# Altium PCB valix_PCB1_Layout1.PcbDoc (part 2 of 3)
Units mil, origin at the board's own origin, x right, y up, seen from the top; angles counter-clockwise.
Board outline 4500 x 2000 mil, 10 copper layers (Top Layer, L2 IntP, L3 Sig, L4 IntP GND, L5 Sig, L6 IntP GND, L7 IntP pwr, L8 Sig, L9 IntP GND, Bottom Layer), stack 81.302 mil thick; 152 components, 166 nets, 818 pads, 544 vias.
Unrouted connection lines stored in the file: 42.
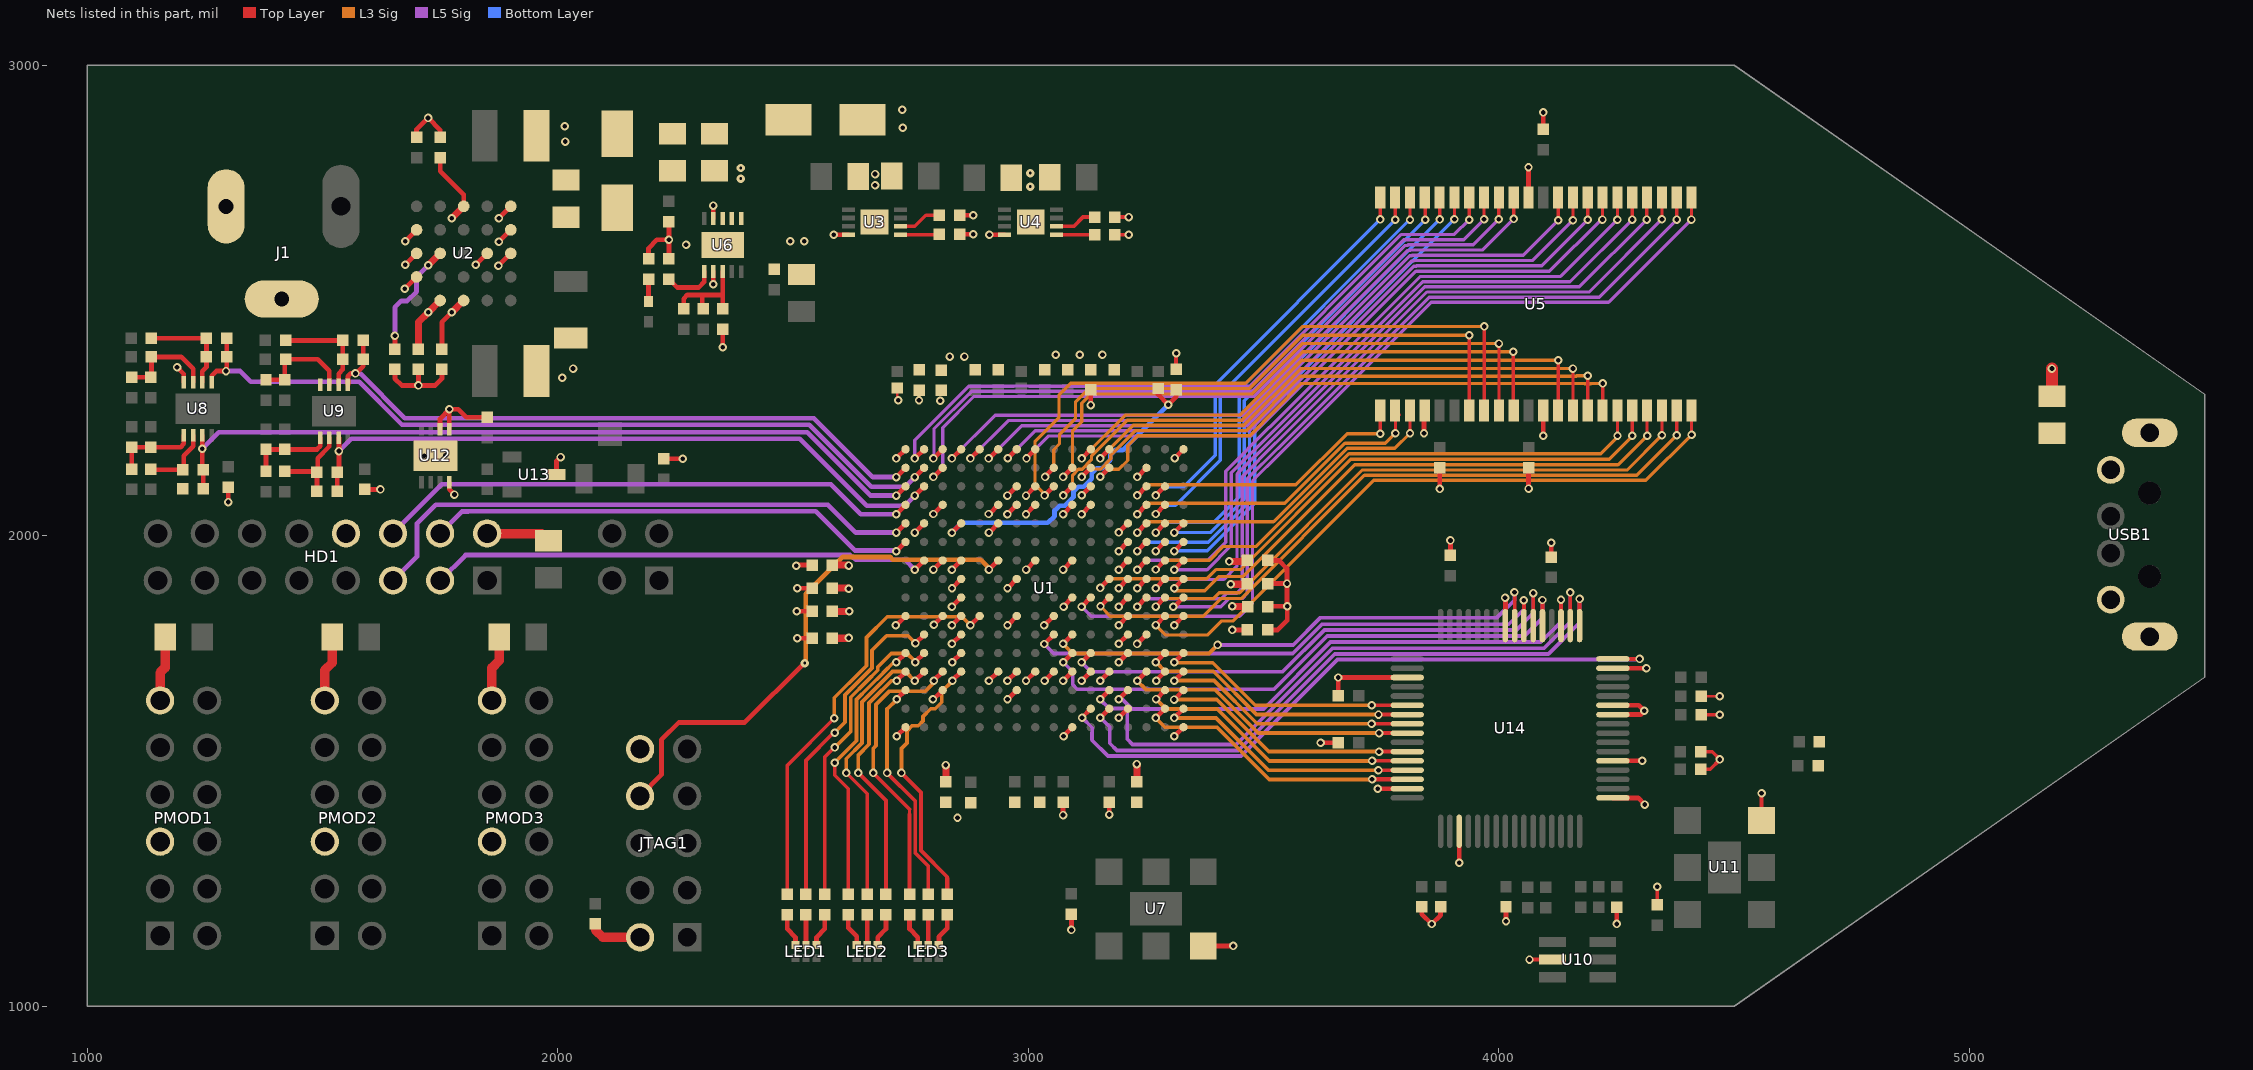
[diagram p10: the nets of this part, all layers, seen from the top]

## Via types
v1: diameter 18, hole 10, Top Layer to Bottom Layer, 261 vias
v2: diameter 18, hole 10, Top Layer to Bottom Layer, tented top, 261 vias
v3: diameter 19.68, hole 7.87, Top Layer to Bottom Layer, 12 vias
v4: diameter 18, hole 6, Top Layer to Bottom Layer, 10 vias

## Nets (pads, with @x,y where several pads share a name; then routed paths per layer and width w, separated by ;. In a path a pad name is that pad's centre, name@x,y a point inside that pad or via, vN(x,y) a via of type N, cw(c..) or ccw(c..) an arc to the next point about the centre after c; other vN are vias at no path point) (continued)
3P3V_FPGA: C52.1 C53.1 C54.1 C55.1 C60.1 C61.1 C62.1 C63.1 C64.1 C66.1 C67.1 C68.1 C69.1 L3.2 U1.C7 U1.D7 U1.D8 U1.D10 U1.D11 U1.F13 U1.G4 U1.G13 U1.H4 U1.H13 U1.J4 U1.J13 U1.K4 U1.K13 U1.L4 U1.L13 U1.M13 U1.N6 U1.N7 U1.N8 U1.N10 U1.N11 | length 1035.7
  Top Layer w5: L3.2@2721.57,2313.67 2721.57,2286.1 v1@2721.72,2285.95
  Top Layer w10: v1@2617.49,1937.76 v1(2618.57,1936.67) ; v1@2617.7,1888.54 v1(2618.57,1887.67) ; v1@2618.02,1782.24 v1(2618.57,1782.8) ; v1@2619.24,1839.33 v1(2619.57,1839.67) ; v2(2837.54,1770.43) U1.L4@2857.22,1790.12 ; v2(2837.54,1849.17) U1.J4@2857.22,1868.86 ; v2(2837.54,1927.91) U1.G4@2857.22,1947.6 ; v2(2837.6,1809.87) U1.K4@2857.22,1829.49 ; v2(2837.77,1888.78) U1.H4@2857.22,1908.23 ; v2(2916.28,1691.69) U1.N6@2935.96,1711.38 ; v2(2955.65,1691.69) U1.N7@2975.33,1711.38 ; v2(2955.65,2046.02) U1.D7@2975.33,2065.71 ; v2(2955.65,2085.39) U1.C7@2975.33,2105.08 ; v2(2995.02,1691.69) U1.N8@3014.7,1711.38 ; v2(2995.02,2046.02) U1.D8@3014.7,2065.71 ; v2(3073.76,1691.69) U1.N10@3093.44,1711.38 ; v2(3073.76,2046.02) U1.D10@3093.44,2065.71 ; v2(3113.13,1691.69) U1.N11@3132.81,1711.38 ; v2(3113.13,2046.02) U1.D11@3132.81,2065.71 ; v1(3132.57,2277.67) 3132.57,2309.57 C53.1@3132.81,2309.8 ; v2@3190.49,1769.06 U1.L13@3211.55,1790.12 ; v2(3191.87,1731.06) U1.M13@3211.55,1750.75 ; v2(3191.87,1809.8) U1.K13@3211.55,1829.49 ; v2(3191.87,1849.17) U1.J13@3211.55,1868.86 ; v2(3191.87,1888.54) U1.H13@3211.55,1908.23 ; v2(3191.87,1927.91) U1.G13@3211.55,1947.6 ; v2(3191.87,1967.28) U1.F13@3211.55,1986.97 ; v1(3433.28,1799.96) C62.1@3465.49,1799.96
  Top Layer w15: C66.1@2583.6,1782.24 v1@2618.02,1782.24 ; C67.1@2583.6,1839.33 v1@2619.24,1839.33 ; C68.1@2583.6,1888.54 v1@2617.7,1888.54 ; C69.1@2583.6,1937.76 v1@2617.49,1937.76 ; v1(2824.36,1512.67) 2824.91,1512.13 C64.1@2824.91,1477.13 ; v1(3230.18,1514.94) 3230.57,1514.54 C63.1@3230.57,1479.39 ; v1(3426.83,1945.5) 3452.59,1945.5 3460.09,1953 C54.1@3465.49,1947.6 ; v1(3430,1897) 3464.1,1897 C55.1@3465.49,1898.39 ; v1(3433,1850) 3431.91,1850 3431.57,1849.67 C60.1@3465.92,1849.67
  other v1: 2812.93,2287.17 2723.36,2288.15 2767.65,2288.15
  other v2: 3191.93,1770.67
4.5V: C7.1 C19.1 D1.1 D2.1 U6.1 U6.2 U6.3
5V_USB: C57.1 D2.2 USB1.1
  other v1: 2732.28,2905.51
  other v2: 2733.27,2867.13
5VINT: C6.1 D1.2 U2.D1 U2.E1 | length 70.7
  Top Layer w10: v1(1875,2625) U2.D1@1900,2650 ; v1(1875,2675) U2.E1@1900,2700
AD1: C35.2 R16.2 U1.B2 U8.1 | length 1709.5
  Top Layer w10: 1264.53,2340 1274.53,2350 v1(1295,2350) 1296.65,2351.65 R16.2@1296.65,2380 ; R16.2@1295,2383.35 1296.65,2385 C35.2@1296.65,2420 C35.2@1296.65,2425 ; v2(2758.8,2124.76) U1.B2@2778.48,2144.45
  L5 Sig w10: v1(1295,2350) 1325,2350 1348,2327 1578,2327 1669,2236 2534.67,2236 2666.34,2104.33 2738.36,2104.33 v2(2758.8,2124.76)
AD2: C58.2 R21.2 U1.C1 U8.7 | length 1687.3
  Top Layer w10: U8.7@1244.84,2213.9 v1(1244.84,2185) 1244.84,2141.81 C58.2@1246.65,2140 R21.2@1246.65,2100 ; v2(2719.43,2085.39) U1.C1@2739.11,2105.08
  L5 Sig w10: v1(1244.84,2185) 1279.84,2220 2530,2220 2664.61,2085.39 v2(2719.43,2085.39)
AD3: C70.2 R27.2 U1.B1 U9.1 | length 1383.1
  Top Layer w10: U9.1@1554.06,2320.67 1554.06,2339.06 1560,2345 v1(1570,2345) 1571.65,2345 1586.65,2360 C70.2@1586.65,2375 R27.2@1586.65,2415 ; v2(2719.43,2124.76) U1.B1@2739.11,2144.45
  L5 Sig w10: v1(1570,2345) 1580,2345 1675,2250 2544.29,2250 2669.53,2124.76 v2(2719.43,2124.76)
AD4: C77.2 R36.2 U1.C2 U9.7 | length 1445.2
  Top Layer w10: R36.2@1531.65,2095 C77.2@1531.65,2135 1535,2138.35 v1(1535,2180) 1535,2207.83 U9.7@1534.37,2208.46 ; v2(2758.8,2085.39) U1.C2@2778.48,2105.08
  L5 Sig w10: v1(1535,2180) 1561,2206 2514.47,2206 2656.5,2063.98 2711.92,2063.98 2711.97,2064.02 2737.43,2064.02 v2(2758.8,2085.39)
AD5: HD1.5 U1.E1 | length 1229.9
  Top Layer w10: v2(2719.49,2006.89) 2719.66,2006.89 U1.E1@2739.11,2026.34
  L5 Sig w10: HD1.5@1650,1905 1701,1956 1701,2026.36 1740.58,2065.94 1788.52,2065.94 1788.8,2065.66 1803.72,2065.66 1804,2065.94 2574.06,2065.94 2633.35,2006.65 2633.58,2006.89 v2(2719.49,2006.89)
AD6: HD1.6 U1.D1 | length 1167.6
  Top Layer w10: v2(2719.43,2046.02) U1.D1@2739.11,2065.71
  L5 Sig w10: HD1.6@1650,2005 1650,2006.3 1753.24,2109.54 2580.46,2109.54 2643.98,2046.02 v2(2719.43,2046.02)
AD7: HD1.3 U1.G2 | length 1071.9
  Top Layer w10: v2(2758.8,1927.91) U1.G2@2778.48,1947.6
  L5 Sig w10: HD1.3@1750,1905 1804,1959 2621.2,1959 2625.48,1954.72 2627.28,1954.72 2633.18,1948.82 2737.89,1948.82 v2(2758.8,1927.91)
AD8: HD1.4 U1.F1 | length 1049.7
  Top Layer w10: v2(2719.43,1967.28) U1.F1@2739.11,1986.97
  L5 Sig w10: HD1.4@1750,2005 1796.66,2051.66 1809.51,2051.66 1809.8,2051.94 2548.06,2051.94 2631.28,1968.72 v2@2717.98,1968.72
ADBUS0: U1.R11 U14.16 | length 1403.4
  Top Layer w8: U14.16@4242.13,1738.19 v1(4298.81,1738.19)
  Top Layer w10: v2@3114,1613.83 U1.R11@3132.81,1632.64
  L5 Sig w8: v2@3114,1613.83 3135.83,1592 3135.83,1580.96 3135.5,1580.62 3135.5,1566.54 3135.83,1566.21 3135.83,1565.17 3169.06,1531.94 3451.94,1531.94 3657,1737 4297.62,1737 v1(4298.81,1738.19)
  other v2: 3114.17,1613.19
ADBUS1: U1.R12 U14.17 | length 1313.9
  Top Layer w8: U14.17@4171.26,1809.06 v1(4171.26,1865.74)
  Top Layer w10: v2(3153,1613.46) U1.R12@3172.18,1632.64
  L5 Sig w8: v2(3153,1613.46) 3173,1593.46 3173,1559 3188.06,1543.94 3445.94,1543.94 3651,1749 4105,1749 4171.26,1815.26 v1(4171.26,1865.74)
ADBUS2: U1.P12 U14.18 | length 1341.5
  Top Layer w8: U14.18@4151.57,1809.06 v1(4151.57,1879.57)
  Top Layer w10: v2(3152.5,1652.32) U1.P12@3172.18,1672.01
  L5 Sig w8: v2(3152.5,1652.32) 3171.82,1633 3202.63,1633 3210,1625.63 3210,1568 3221.42,1556.58 3441.61,1556.58 3646.03,1761 4096,1761 4151.57,1816.57 v1(4151.57,1879.57)
ADBUS3: U1.P13 U14.19 | length 1154.7
  Top Layer w8: U14.19@4131.89,1809.06 v1(4131.89,1863.89)
  Top Layer w10: v2(3191.87,1652.32) U1.P13@3211.55,1672.01
  L5 Sig w8: v2(3191.87,1652.32) 3200.28,1652.32 3220.6,1632 3500.06,1632 3642.06,1774 4089,1774 4131.89,1816.89 v1(4131.89,1863.89)
ADBUS4: U1.M10 U14.21 | length 1241
  Top Layer w8: U14.21@4092.52,1809.06 v1(4092.52,1863.52)
  Top Layer w10: v2(3074,1731.31) U1.M10@3093.44,1750.75
  L5 Sig w8: v2(3074,1731.31) 3094.31,1711 3094.31,1683.69 3104,1674 3522,1674 3635,1787 4054,1787 4092.52,1825.52 v1(4092.52,1863.52)
ADBUS5: U1.M11 U14.22 | length 1159
  Top Layer w8: U14.22@4072.83,1809.06 v1(4072.83,1878.17)
  Top Layer w10: v2(3113.13,1731.06) U1.M11@3132.81,1750.75
  L5 Sig w8: v2(3113.13,1731.06) 3133.19,1711 3540,1711 3629,1800 4037,1800 4072.83,1835.83 v1(4072.83,1878.17)
ADBUS6: U1.L9 U14.23 | length 1167.7
  Top Layer w8: v1(4053,1863) 4053,1809.2 U14.23@4053.15,1809.06
  Top Layer w10: v2(3033.95,1770) U1.L9@3054.07,1790.12
  L5 Sig w8: v2(3033.95,1770) 3053.95,1750 3562.03,1750 3624.03,1812 4021,1812 4053,1844 v1(4053,1863)
ADBUS7: U1.L10 U14.24 | length 1130.9
  Top Layer w8: v1(4033,1880) 4033.46,1879.54 U14.24@4033.46,1809.06
  Top Layer w10: v2(3073.76,1770.43) U1.L10@3093.44,1790.12
  L5 Sig w8: v1(3402,1768) 3563.06,1768 3621.06,1826 3996,1826 4033.52,1863.52 4033,1864.04 v1(4033,1880)
  L3 Sig w8: v2(3073.76,1770.43) 3094.19,1750 3384,1750 v1(3402,1768)
BDBUS0: U1.M16 U14.38 | length 562.8
  Top Layer w8: v1(3729.76,1639.76) U14.38@3805.12,1639.76
  Top Layer w10: v2@3309,1730.09 U1.M16@3329.66,1750.75
  L3 Sig w8: v2@3309,1730.09 3391.91,1730.09 3482.24,1639.76 v1(3729.76,1639.76)
  other v2: 3310.04,1731.3
BDBUS1: U1.M15 U14.39 | length 607.5
  Top Layer w8: v1(3744.08,1620.08) U14.39@3805.12,1620.08
  Top Layer w10: v2(3271,1731.46) U1.M15@3290.29,1750.75
  L3 Sig w8: v2(3271,1731.46) 3290.46,1712 3393,1712 3484.92,1620.08 v1(3744.08,1620.08)
BDBUS2: U1.N16 U14.40 | length 558.8
  Top Layer w8: v1(3729.39,1600.39) U14.40@3805.12,1600.39
  Top Layer w10: v2@3311,1692.72 U1.N16@3329.66,1711.38
  L3 Sig w8: v2@3311,1692.72 3394.28,1692.72 3486.61,1600.39 v1(3729.39,1600.39)
  other v2: 3310.04,1691.93
BDBUS3: U1.N14 U14.41 | length 647.7
  Top Layer w8: v1(3745.29,1580.71) U14.41@3805.12,1580.71
  Top Layer w10: v2(3231.24,1691.69) U1.N14@3250.92,1711.38
  L3 Sig w8: v2(3231.24,1691.69) 3249.93,1673 3396.14,1673 3488.43,1580.71 v1(3745.29,1580.71)
BDBUS4: U1.P16 U14.43 | length 569.6
  Top Layer w8: v1(3745.34,1541.34) U14.43@3805.12,1541.34
  Top Layer w10: v2(3309.65,1652) U1.P16@3329.66,1672.01
  L3 Sig w8: v2(3309.65,1652) 3400.17,1652 3510.83,1541.34 v1(3745.34,1541.34)
BDBUS5: U1.P15 U14.44 | length 615.1
  Top Layer w7: v1(3730.35,1521.65) U14.44@3805.12,1521.65
  Top Layer w10: v2(3271.28,1653) U1.P15@3290.29,1672.01
  L3 Sig w8: v2(3271.28,1653) 3292.28,1632 3401.46,1632 3511.81,1521.65 v1(3730.35,1521.65)
BDBUS6: U1.R16 U14.45 | length 569
  Top Layer w8: v1(3743.97,1501.97) U14.45@3805.12,1501.97
  Top Layer w10: v2(3309.98,1612.95) U1.R16@3329.66,1632.64
  L3 Sig w8: v2(3309.98,1612.95) 3398.86,1612.95 3509.84,1501.97 v1(3743.97,1501.97)
BDBUS7: U1.R15 U14.46 | length 616.5
  Top Layer w10: v2(3270.61,1612.95) U1.R15@3290.29,1632.64 ; v1(3730.28,1482.28) U14.46@3805.12,1482.28
  L3 Sig w8: v2(3270.61,1612.95) 3290.56,1593 3401.09,1593 3511.81,1482.28 v1(3730.28,1482.28)
EN: JTAG1.8 U1.G6 | length 1117.3
  Top Layer w10: JTAG1.8@2175,1446.73 2220.39,1492.13 2220.39,1566.13 2257.61,1603.35 2397.64,1603.35 2523.71,1729.42 v4(2524.73,1729.42) ; v2@2918.36,1930 U1.G6@2935.96,1947.6
  L3 Sig w10: v4(2524.73,1729.42) 2527.09,1731.78 2527.09,1876.5 2605.59,1955 2706.25,1955 2711.97,1949.28 2899.08,1949.28 v2@2918.36,1930
  other v2: 2916.34,1928.15
GND: C1.2 C2.2 C3.2 C4.2 C5.2 C6.2 C7.2 C8.2 C9.2 C10.2 C11.2 C12.2 C13.2 C14.2 C15.2 C16.2 C17.2 C18.2 C19.2 C20.2 C22.2 C23.2 C24.2 C25.2 C26.2 C27.2 C28.2 C29.2 C30.2 C31.2 C32.2 C33.2 C34.2 C36.1 C37.1 C38.2 C39.2 C40.2 C41.2 C42.2 C43.2 C44.2 C45.2 C46.2 C47.2 C48.2 C49.2 C51.2 C52.2 C53.2 C54.2 C55.2 C56.2 C57.2 C59.2 C60.2 C61.2 C62.2 C63.2 C64.2 C66.2 C67.2 C68.2 C69.2 C71.2 C72.2 C74.2 C75.2 C76.2 C78.2 HD1.2 HD1.8 J1.2 J1.3 JTAG1.2 JTAG1.10 PMOD1.5 PMOD1.11 PMOD2.5 PMOD2.11 PMOD3.5 PMOD3.11 R1.2 R3.2 R4.2 R5.1 R6.2 R7.2 R26.1 R41.2 U1.A1 U1.A16 U1.B14 U1.C8 U1.C11 U1.D3 U1.D6 U1.E2 U1.E6 U1.E13 U1.F15 U1.G3 U1.G8 U1.G10 U1.H7 U1.H14 U1.J10 U1.K1 U1.K3 U1.K7 U1.K9 U1.K16 U1.L14 U1.M4 U1.N9 U1.N12 U1.N15 U1.P3 U1.P7 U1.R13 U1.T1 U1.T10 U1.T16 U2.B5 U2.C1 U2.C2 U2.C5 U2.D5 U3.8 U3.9 U4.8 U4.9 U5.12 U5.26 U5.34 U6.4 U6.7 U6.11 U7.3 U8.4 U9.4 U10.2 U11.3 U12.4 U12.5 U12.6 U12.9 U13.3 U14.1 U14.5 U14.10 U14.11 U14.15 U14.25 U14.35 U14.47 U14.51 USB1.4 USB1.G1 USB1.G2 | length 5117.8
  Top Layer w6: C59.2@4429.65,1659 v1(4469.04,1659)
  Top Layer w8: C14.2@3184.06,2639.76 v1(3213.58,2639.76) ; C16.2@3184.06,2677.17 v1(3213.58,2677.17) ; C71.2@3313.98,2353.35 v1(3313.98,2387.8) ; v1(4064.96,1099.41) U10.2@4114.17,1099.41 ; C76.2@4336.61,1215.55 v1(4336.61,1253.94) ; C45.2@4428.65,1504 4448.88,1504 v1(4469.49,1524.61) 4453.09,1541 R26.1@4428.65,1541 ; C49.2@4429.65,1619.72 v1(4469.13,1619.72) ; U11.3@4558.07,1395.28 v1(4558.07,1452.76)
  Top Layer w10: v1(1190.94,2358.27) 1205.47,2343.74 U8.4@1205.47,2326.1 ; v1(1300,2071.65) C51.2@1300,2103.35 ; C74.2@1590,2098.35 v1(1623.11,2098.35) ; R1.2@1653.94,2353.35 1653.94,2333.86 1668.31,2319.49 v1(1703.94,2319.49) ; v1(1674.61,2524.61) U2.B5@1700,2550 ; v1(1675.79,2575.79) U2.C5@1700,2600 ; v1(1675.98,2625.98) U2.D5@1700,2650 ; R4.2@1700,2846.65 1700,2863.39 v1(1724.41,2887.8) 1750,2862.2 C23.2@1750,2846.65 ; R3.2@1703.94,2353.35 v1(1703.94,2319.49) ; U12.6@1749.84,2226.1 1749.84,2248.88 v1@1769.53,2268.57 ; C24.2@1753.94,2353.35 1753.94,2334.06 1739.37,2319.49 v1(1703.94,2319.49) ; U12.4@1769.53,2113.9 1769.53,2098.58 v1@1781.5,2086.61 ; U12.5@1769.53,2226.1 1769.53,2268.86 1788.39,2268.86 1805.59,2251.65 C75.2@1850,2251.65 ; v1(1825.79,2575.79) U2.C2@1850,2600 ; v1(1874.02,2574.02) U2.C1@1900,2600 ; U13.3@1997.24,2130 1997.24,2158.66 v1(2005.91,2167.32) ; C31.2@2080,1175.08 C31.2@2080.71,1174.37 ; R5.1@2192.91,2588.58 2192.91,2611.22 2210.63,2628.94 v1(2236.22,2628.94) ; R41.2@2225,2163.65 v1(2265.48,2163.65) ; C25.2@2236.22,2588.58 v1(2236.22,2628.94) ; R7.2@2236.22,2667.32 v1(2236.22,2628.94) ; v1(2330.71,2534.45) U6.7@2330.71,2562.01 ; U6.4@2330.71,2674.21 v1(2330.71,2701.77) ; v1(2350.39,2400.59) R6.2@2350.39,2438.98 ; v1(2507.01,1936.12) 2508.65,1937.76 C69.2@2540.29,1937.76 ; v1(2508.11,1839.33) C67.2@2540.29,1839.33 ; v1(2509.09,1782.24) C66.2@2540.29,1782.24 ; v1(2509.09,1888.54) C68.2@2540.29,1888.54 ; v1(2586.61,2639.76) U3.8@2618.11,2639.76 ; v2@2719.08,1809.46 U1.K1@2739.11,1829.49 ; v2(2719.49,2164.37) 2719.66,2164.37 U1.A1@2739.11,2183.82 ; v2(2720.47,1573.82) 2720.47,1574.63 U1.T1@2739.11,1593.27 ; v2@2759.84,2006.89 2759.84,2007.7 U1.E2@2778.48,2026.34 ; v2@2795.28,1649.43 U1.P3@2817.85,1672.01 ; v2@2795.45,2043.31 U1.D3@2817.85,2065.71 ; v2@2799.21,1928.96 U1.G3@2817.85,1947.6 ; v2(2799.39,1811.02) U1.K3@2817.85,1829.49 ; v2@2838.76,1732.28 U1.M4@2857.22,1750.75 ; C13.2@2853.74,2640.95 v1(2882.68,2640.95) ; C15.2@2853.74,2680.95 v1(2883.03,2680.95) ; v1(2917.32,2639.76) U4.8@2949.8,2639.76 ; v2@2917.5,2007.87 U1.E6@2935.96,2026.34 ; v2@2917.5,2047.24 U1.D6@2935.96,2065.71 ; v2@2956.87,1653.54 U1.P7@2975.33,1672.01 ; v2@2956.87,1811.02 U1.K7@2975.33,1829.49 ; v2@2956.87,1889.76 U1.H7@2975.33,1908.23 ; v2(2995,2085.38) U1.C8@3014.7,2105.08 ; v2@2996.24,1929.13 U1.G8@3014.7,1947.6 ; v2@3034.04,1809.46 U1.K9@3054.07,1829.49 ; v2@3035.61,1692.91 U1.N9@3054.07,1711.38 ; v2@3072,1573.9 3070.99,1572.89 3070.99,1572.83 3072,1571.83 U1.T10@3093.44,1593.27 ; v1(3073.76,1406.56) C32.2@3073.76,1433.82 ; v2@3074.98,1850.39 U1.J10@3093.44,1868.86 ; v2@3074.98,1929.13 U1.G10@3093.44,1947.6 U1.G10@3089.33,1947.6 ; v1(3091.55,1162.39) C27.2@3091.55,1195.55 ; v2(3113.73,2086) U1.C11@3132.81,2105.08 ; v2@3151.8,1691 U1.N12@3172.18,1711.38 ; v1(3172.18,1407.54) C40.2@3172.18,1433.82 ; v2@3190.91,1612 U1.R13@3211.55,1632.64 ; v2(3192.21,2007) U1.E13@3211.55,2026.34 ; v2(3231,1770.2) U1.L14@3250.92,1790.12 ; v2(3231.3,1888.78) 3231.47,1888.78 U1.H14@3250.92,1908.23 ; v2@3232,2125.53 U1.B14@3250.92,2144.45 ; v2@3271.91,1693 U1.N15@3290.29,1711.38 ; v2@3272.32,1969 U1.F15@3290.29,1986.97 ; v2(3310.17,1810) U1.K16@3329.66,1829.49 ; v2(3311,2165.16) U1.A16@3329.66,2183.82 ; v2@3312.39,1576 U1.T16@3329.66,1593.27 ; U7.3@3371.55,1128.46 v1(3435.51,1128.46) ; C62.2@3508.8,1799.96 3529.96,1799.96 3550,1820 v1(3550,1850) 3509.56,1850 C60.2@3509.23,1849.67 ; C55.2@3508.8,1898.39 v1(3549.61,1898.39) ; C54.2@3508.8,1947.6 3532.4,1947.6 3549.61,1930.39 v1(3549.61,1898.39) ; v1@3549.61,1850.39 v1(3549.61,1898.39) ; v1(3621,1560) C46.2@3658.35,1560 ; C44.2@3658.35,1660 v1@3658.35,1698.35 ; v1(3658.82,1698.82) U14.35@3805.12,1698.82 ; v1(3742.6,1462.6) U14.47@3805.12,1462.6 ; C43.2@3836,1211.35 3836,1196 v1(3857,1175) 3876,1194 C48.2@3876,1211.35 ; v1(3840.74,2217.63) 3840.74,2264.5 U5.26@3842.35,2266.12 ; C2.2@3873.85,2144.07 3874.02,2143.91 v1(3874.02,2099.41) ; C36.1@3897,1958.65 v1(3897,1990) ; v1(3915.35,1305.35) U14.51@3915.35,1372.05 ; v1(4013,1868) 4013.78,1867.22 U14.25@4013.78,1809.06 ; v1(4015,1181) C47.2@4015,1211.35 ; C1.2@4062.83,2144.07 4063.98,2142.92 4062.99,2141.94 v1(4062.99,2100.39) ; U5.12@4062.83,2718.87 v1(4062.83,2782.83) ; v1(4094.32,2212.32) U5.34@4094.32,2266.12 ; C3.2@4094.39,2863.46 v1(4094.39,2899.61) ; C37.1@4111,1954.65 v1(4111,1985) ; U14.1@4242.13,1442.91 4295.91,1442.91 v1(4310,1428.83) ; U14.5@4242.13,1521.65 v1(4304.65,1521.65) ; U14.10@4242.13,1620.08 4300.92,1620.08 v1(4309,1628.16) 4297.39,1639.76 U14.11@4242.13,1639.76 ; U14.15@4242.13,1718.5 v1(4313.5,1718.5) ; v1(4250.06,1175.06) C42.2@4250.06,1210.35
  Top Layer w20: PMOD1.11@1155,1650 1155,1709.13 1165.63,1719.76 C12.2@1165.63,1785 ; PMOD2.11@1505,1650 1505,1714.65 1520.63,1730.28 C18.2@1520.63,1785 ; HD1.2@1850,2005 1851.06,2003.94 1965.43,2003.94 C26.2@1980,1989.37 ; PMOD3.11@1860,1650 1860,1719.25 1875.63,1734.88 C22.2@1875.63,1785 ; C31.2@2080.71,1174.37 2080.71,1161.42 2095.39,1146.73 JTAG1.2@2175,1146.73
  Top Layer w25: C57.2@5175.2,2296.26 v1(5175.2,2355.32)
  other v1: 2849.41,1400.59 1780.51,2087.6 1716.54,2170.28 1760.83,2171.26 1769.77,2268.81 2009.84,2335.63 2032.48,2355.32 2832.68,2380.91 2864.17,2380.91 3058.07,2384.84 3109.25,2384.84 3157.48,2384.84 2272.64,2618.11 2494.09,2625.98 2523.62,2625.98 2015.75,2837.6 2014.76,2870.08
  other v2: 3074.8,1573.82 3310.04,1573.82 3191.93,1613.19 2797.24,1652.56 2955.71,1652.56 3034.45,1691.93 3152.56,1691.93 3271.65,1691.93 2838.58,1731.3 2718.5,1810.04 2955.71,1810.04 3033.46,1810.04 3074.8,1849.41 2955.71,1888.78 2798.23,1928.15 2995.08,1928.15 3073.82,1928.15 3270.67,1967.52 2758.86,2006.89 2916.34,2006.89 2798.23,2046.26 2915.35,2046.26 3231.3,2125 2674.21,2745.08 2674.21,2768.7
  other v4: 3003.94,2742.13 2388.78,2758.86 3003.94,2770.67 2388.78,2781.5
LED1_B: R8.2 U1.K5 | length 890.2
  Top Layer w8: R8.2@2487.48,1238.19 2487.48,1512.09 v1(2587.6,1612.2)
  Top Layer w10: v2(2876.91,1809.8) U1.K5@2896.59,1829.49
  L3 Sig w8: v1(2587.6,1612.2) 2587.6,1655.75 2645.85,1714 2646.04,1714 2656,1723.96 2656,1783.95 2700.07,1828.02 2858.69,1828.02 v2(2876.91,1809.8)
LED1_G: R10.2 U1.M2 | length 654.8
  Top Layer w8: R10.2@2567.48,1238.19 2567.48,1530.08 v1@2587.6,1550.2
  Top Layer w10: v2@2760.02,1732.28 U1.M2@2778.48,1750.75
  L3 Sig w8: v1(2588.58,1550.2) 2622.65,1584.27 2622.65,1656.83 2655.82,1690 2655.98,1690 2680,1714.02 2680,1721.34 2708.66,1750 2742.3,1750 v2@2760.02,1732.28
  other v2: 2759.84,1731.3
LED1_R: R9.2 U1.L2 | length 713.3
  Top Layer w8: R9.2@2527.48,1238.19 2527.48,1522.56 v1@2586.61,1581.69
  Top Layer w10: v2(2760.02,1771.65) U1.L2@2778.48,1790.12
  L3 Sig w8: v1(2588.58,1581.69) 2610.65,1603.76 2610.65,1661.83 2650.82,1702 2651.01,1702 2668,1718.99 2668,1756.58 2698.85,1787.43 2744.24,1787.43 v2(2760.02,1771.65)
LED2_B: R11.2 U1.M1 | length 590.2
  Top Layer w7: v1(2588.58,1517.72) 2588.58,1491.14 2617.48,1462.24
  Top Layer w8: R11.2@2617.48,1238.19 2617.48,1462.24
  Top Layer w10: v2@2719.43,1731.06 U1.M1@2739.11,1750.75
  L3 Sig w7: v2@2718.27,1731.06 v2@2719.43,1731.06
  L3 Sig w8: v1(2588.58,1517.72) 2588.58,1518.42 2634.65,1564.49 2634.65,1651.86 2660.79,1678 2660.95,1678 2692,1709.05 2692,1709.21 2713.85,1731.06 v2@2718.27,1731.06
  other v2: 2719.49,1731.3
LED2_G: R13.2 U1.N1 | length 545.5
  Top Layer w8: v1(2638.78,1496.06) 2697.48,1437.36 R13.2@2697.48,1238.19
  Top Layer w10: v2@2719.43,1691.69 U1.N1@2739.11,1711.38
  L3 Sig w8: v1(2638.78,1496.06) 2638.78,1534.45 2661.42,1557.09 2661.42,1644.69 2670.73,1654 2670.89,1654 2708.59,1691.69 v2@2719.43,1691.69
  other v2: 2720.47,1691.93
LED2_R: R12.2 U1.N2 | length 615.7
  Top Layer w7: v1(2613.19,1496.06) 2657.48,1451.77
  Top Layer w8: R12.2@2657.48,1238.19 2657.48,1451.77
  Top Layer w10: v2(2758.8,1691.69) U1.N2@2778.48,1711.38
  L3 Sig w8: v1(2613.19,1496.06) 2613.19,1526.06 2646.65,1559.52 2646.65,1646.89 2665.76,1666 2665.92,1666 2711.28,1711.36 2739.13,1711.36 v2(2758.8,1691.69)
LED3_B: R14.2 U1.N3 | length 611.2
  Top Layer w7: 2747.48,1408.46 2747.48,1418.86
  Top Layer w8: v1(2670.28,1496.06) 2747.48,1418.86 ; R14.2@2747.48,1238.19 2747.48,1408.46
  Top Layer w10: v2(2799.39,1691.69) 2799.39,1692.91 U1.N3@2817.85,1711.38
  L3 Sig w8: v1(2670.28,1496.06) 2670.28,1548.23 2676.18,1554.13 2676.18,1641.73 2703.83,1669.39 2780.42,1669.39 2799.39,1688.35 v2(2799.39,1691.69)
LED3_G: R17.2 U1.N4 | length 579.6
  Top Layer w7: v2(2838.76,1691.69) v2@2838.76,1692.91
  Top Layer w8: v1(2730.32,1496.06) 2771.65,1454.72 2771.65,1330.95 2827.48,1275.12 2827.48,1271.93
  Top Layer w10: R17.2@2827.48,1238.19 2827.48,1271.93 ; v2@2838.76,1692.91 U1.N4@2857.22,1711.38
  L3 Sig w8: v1(2730.32,1496.06) 2730.32,1548.23 2741.86,1559.77 2741.86,1585.36 2752.69,1596.19 2766.07,1596.19 2776.03,1606.15 2776.03,1616.02 2792.45,1632.43 2802.32,1632.43 2815.94,1646.06 2815.94,1668.88 v2(2838.76,1691.69)
LED3_R: R15.2 U1.P1 | length 486.7
  Top Layer w7: 2759.48,1414.37 2759.48,1436.39
  Top Layer w8: v1(2699.8,1496.06) 2759.48,1436.39 ; 2759.48,1414.37 2759.48,1326.15 2787.48,1298.15 R15.2@2787.48,1238.19
  Top Layer w10: v2(2720.65,1652.32) 2720.65,1653.54 U1.P1@2739.11,1672.01
  L3 Sig w8: v1(2699.8,1496.06) 2699.8,1631.89 2700.21,1631.89 v2(2720.65,1652.32)
MRAM_A0: U1.J11 U5.1 | length 1880.8
  Top Layer w7: v1@4409.28,2672 U5.1@4409.28,2718.87
  Top Layer w10: v2(3113.13,1849.17) U1.J11@3132.81,1868.86
  L5 Sig w7: v2(3113.13,1849.17) 3133.56,1828.74 3448.82,1828.74 3476.33,1856.25 3476.33,2116.55 3535.04,2175.26 3535.36,2175.26 3856.1,2496 4233,2496 v1(4409,2672)
MRAM_A1: U1.J16 U5.2 | length 1630.4
  Top Layer w7: v2(3308,1849) v2@3309.8,1849 ; v1@4377.79,2672 U5.2@4377.79,2718.87
  Top Layer w10: v2@3309.8,1849 U1.J16@3329.66,1868.86
  L5 Sig w7: v2(3308,1849) 3409.04,1849 3416.5,1856.46 3416.5,1856.83 3426.17,1866.5 3454.1,1866.5 3465.33,1877.73 3465.33,2121.11 3530.49,2186.26 3530.8,2186.26 3851.54,2507 4213,2507 v1(4378,2672)
MRAM_A2: U1.J14 U5.3 | length 1668.8
  Top Layer w7: v1(4346.29,2672.29) U5.3@4346.29,2718.87
  Top Layer w10: v2(3231.24,1849.17) U1.J14@3250.92,1868.86
  L5 Sig w7: v2(3231.24,1849.17) 3248.2,1866.14 3410.25,1866.14 3422.06,1877.95 3442.91,1877.95 3454.33,1889.37 3454.33,2125.66 3525.93,2197.26 3526.24,2197.26 3846.98,2518 4192,2518 v1(4346.29,2672.29)
MRAM_A3: U1.H15 U5.4 | length 1557
  Top Layer w7: v1(4314,2672) 4314,2718.08 U5.4@4314.8,2718.87
  Top Layer w10: v2(3270.61,1888.54) U1.H15@3290.29,1908.23
  L5 Sig w7: v2(3270.61,1888.54) 3289.06,1907 3414.87,1907 3443.33,1935.46 3443.33,2130.22 3521.37,2208.26 3521.69,2208.26 3842.43,2529 4171,2529 v1(4314,2672)
MRAM_A4: U1.G16 U5.5 | length 1446.3
  Top Layer w7: v1(4283,2672) 4283.3,2672.3 U5.5@4283.3,2718.87
  Top Layer w10: v2(3310,1927.94) U1.G16@3329.66,1947.6
  L5 Sig w7: v2(3310,1927.94) 3379.71,1927.94 3431.39,1979.62 3431.39,2133.84 3516.82,2219.26 3517.13,2219.26 3837.87,2540 4151,2540 v1(4283,2672)
MRAM_A5: U1.F14 U5.18 | length 1120.9
  Top Layer w7: U5.18@3873.85,2718.87 3876.97,2715.76 3874.02,2712.8 v1(3874.02,2672.24)
  Top Layer w10: v2@3233,1969 U1.F14@3250.92,1986.92
  Bottom Layer w7: v2@3233,1969 3250,1986 3382.56,1986 3470,2073.44 3470,2268.23 v1(3874.02,2672.24)
  other v2: 3231.3,1967.52
MRAM_A6: U1.E16 U5.19 | length 1002.6
  Top Layer w7: U5.19@3842.35,2718.87 3843.5,2717.72 v1(3843.5,2671.26)
  Top Layer w10: v2@3311.32,2008 U1.E16@3329.66,2026.34
  Bottom Layer w7: v2@3312.32,2007 3388,2007 3459,2078 3459,2286.76 v1(3843.5,2671.26)
  other v2: 3310.04,2006.89
MRAM_A7: U1.E15 U5.20 | length 1025.2
  Top Layer w7: v2(3270.67,2006.89) v2@3270.84,2006.89 ; U5.20@3810.86,2718.87 3811.02,2718.71 v1(3811.02,2671.26)
  Top Layer w10: v2@3270.84,2006.89 U1.E15@3290.29,2026.34
  Bottom Layer w7: v2(3270.67,2006.89) 3270.84,2006.89 3292.95,2029 3394,2029 3448,2083 3448,2309.41 3811.02,2672.43 v1(3811.02,2671.26)
MRAM_A8: U1.D15 U5.21 | length 923.3
  Top Layer w7: U5.21@3779.36,2718.87 3780.51,2717.72 3779.53,2716.74 v1(3779.53,2671.26)
  Top Layer w10: v2@3271.58,2047 U1.D15@3290.29,2065.71
  Bottom Layer w7: v2@3271.58,2047 3289.54,2064.96 3312.88,2064.96 3408,2160.08 3408,2299.73 v1(3779.53,2671.26)
  other v2: 3270.67,2046.26
MRAM_A9: U1.C15 U5.22 | length 879.1
  Top Layer w7: U5.22@3747.87,2718.87 3748.03,2718.71 v1(3748.03,2672.24)
  Top Layer w10: v2@3272,2086.79 U1.C15@3290.29,2105.08
  Bottom Layer w7: v2@3272,2086.79 3289.21,2104 3330,2104 3397,2171 3397,2321.21 v1(3748.03,2672.24)
  other v2: 3270.67,2085.63
MRAM_A10: U1.C14 U5.23 | length 646.9
  Top Layer w7: v2@3232.28,2085.63 v2@3232.28,2086.44 ; v1@3747.87,2217 U5.23@3747.87,2266.12
  Top Layer w10: v2@3232.28,2086.44 U1.C14@3250.92,2105.08
  L3 Sig w7: v2@3232.28,2085.63 3232.28,2086.44 3254.11,2108.26 3568.68,2108.26 3677.41,2217 v1(3748,2217)
  other v2: 3231.3,2085.63
MRAM_A11: U1.D14 U5.24 | length 703.2
  Top Layer w7: U5.24@3779.36,2266.12 3779,2265.76 3788,2256.76 3780,2248.76 v1(3780,2218)
  Top Layer w10: v2(3231.21,2046) U1.D14@3250.92,2065.71
  L3 Sig w7: v2(3231.21,2046) 3254.11,2068.89 3544.86,2068.89 3672.82,2196.85 3758.85,2196.85 v1(3780,2218)
MRAM_A12: U1.E14 U5.25 | length 743
  Top Layer w7: v2(3231.3,2006.89) v2@3231.47,2006.89 ; U5.25@3810.86,2266.12 3811,2265.98 v1(3811,2218)
  Top Layer w10: v2@3231.47,2006.89 U1.E14@3250.92,2026.34
  L3 Sig w7: v2(3231.3,2006.89) 3231.47,2006.89 3254.11,2029.52 3521.05,2029.52 3677.38,2185.85 3778.85,2185.85 v1(3811,2218)
MRAM_A13: U1.J15 U5.42 | length 1306.1
  Top Layer w7: v1(4346.29,2213.29) U5.42@4346.29,2266.12
  Top Layer w10: v2(3271,1849.57) U1.J15@3290.29,1868.86
  L3 Sig w7: v2(3271,1849.57) 3287.93,1866.5 3393.07,1866.5 3405.57,1879 3448.88,1879 3478.5,1908.62 3709.65,2139.76 4272.76,2139.76 v1(4346.29,2213.29)
MRAM_A14: U1.J12 U5.43 | length 1471.5
  Top Layer w7: v1(4377.79,2213.79) U5.43@4377.79,2266.12
  Top Layer w10: v2(3153.32,1850) U1.J12@3172.18,1868.86
  L3 Sig w7: v2(3153.32,1850) 3174.32,1829 3371.32,1829 3408.82,1866.5 3451.94,1866.5 3714.2,2128.76 4292.76,2128.76 v1(4377.79,2213.79)
MRAM_A15: U1.K15 U5.44 | length 1402.5
  Top Layer w7: v1(4409.28,2214.72) U5.44@4409.28,2266.12
  Top Layer w10: v2(3271,1810.2) U1.K15@3290.29,1829.49
  L3 Sig w7: v2(3271,1810.2) 3270.8,1810.2 3292,1789 3380.54,1789 3410.54,1819 3435.14,1819 3733.91,2117.76 4312.33,2117.76 v1(4409.28,2214.72)
MRAM_DQL0: U1.A8 U5.7 | length 1507.4
  Top Layer w7: v1(4220,2672) 4220,2718.57 U5.7@4220.31,2718.87
  Top Layer w10: v2@2996,2165.12 U1.A8@3014.7,2183.82
  L5 Sig w7: v2@2996,2165.12 3042.96,2212.08 3473.72,2212.08 3823.64,2562 4107,2562 4217,2672 v1(4220,2672)
  other v2: 2996.06,2164.37
MRAM_DQL1: U1.A7 U5.8 | length 1517.4
  Top Layer w7: v1(4188.81,2671.81) U5.8@4188.81,2718.87
  Top Layer w10: v2(2956,2164.49) U1.A7@2975.33,2183.82
  L5 Sig w7: v2(2956,2164.49) 3014.59,2223.08 3469.17,2223.08 3819.09,2573 3824.2,2573 3825.2,2574 4091,2574 v1(4188.81,2671.81)
MRAM_DQL2: U1.A6 U5.9 | length 1528.8
  Top Layer w7: v2(2915.35,2164.37) v2@2916.51,2164.37 ; v1(4157.31,2670.31) U5.9@4157.31,2718.87
  Top Layer w10: v2@2916.51,2164.37 U1.A6@2935.96,2183.82
  L5 Sig w7: v2(2915.35,2164.37) 2916.51,2164.37 2986.22,2234.08 3464.61,2234.08 3814.53,2584 3819.65,2584 3820.65,2585 4072,2585 v1(4157.31,2670.31)
MRAM_DQL3: U1.A5 U5.10 | length 1537.6
  Top Layer w7: v1(4125.82,2670.18) U5.10@4125.82,2718.87
  Top Layer w10: v2@2876,2163.23 U1.A5@2896.59,2183.82
  L5 Sig w7: v2@2876,2163.23 2957.85,2245.08 3460.05,2245.08 3809.98,2595 3815.09,2595 3816.09,2596 4051.64,2596 v1(4125.82,2670.18)
  other v2: 2876.97,2164.37
MRAM_DQL4: U1.A4 U5.13 | length 1477.8
  Top Layer w7: v2(2837.6,2164.37) v2@2837.77,2164.37 ; v1(4031.33,2673.33) U5.13@4031.33,2718.87
  Top Layer w10: v2@2837.77,2164.37 U1.A4@2857.22,2183.82
  L5 Sig w7: v2(2837.6,2164.37) 2837.77,2164.37 2929.48,2256.08 3455.5,2256.08 3805.42,2606 3810.53,2606 3811.82,2607.28 3965.28,2607.28 v1(4031.33,2673.33)
MRAM_DQL5: U1.B3 U5.14 | length 1550.4
  Top Layer w7: v1(3999.83,2672.83) U5.14@3999.83,2718.87
  Top Layer w10: v2@2799,2125.6 U1.B3@2817.85,2144.45
  L5 Sig w7: v2@2799,2125.6 2818,2144.6 2818,2229.93 2883.98,2295.91 2978.48,2295.91 2978.74,2296.17 2992.41,2296.17 2992.67,2295.91 3479.59,2295.91 3479.93,2296.26 3480.12,2296.26 3800.86,2617 3805.98,2617 3807.26,2618.28 3945.28,2618.28 v1(3999.83,2672.83)
  other v2: 2798.23,2125
MRAM_DQL6: U1.A3 U5.15 | length 1490.4
  Top Layer w7: v1(3968.34,2672.34) U5.15@3968.34,2718.87
  Top Layer w10: v2@2799,2164.97 U1.A3@2817.85,2183.82
  L5 Sig w7: v2@2799.38,2163.39 2799.38,2226.87 2879.42,2306.91 2973.93,2306.91 2974.18,2307.17 2996.97,2307.17 2997.22,2306.91 3475.03,2306.91 3477.17,2309.06 3477.36,2309.06 3797.59,2629.28 3925.28,2629.28 v1(3968.34,2672.34)
  other v2: 2798.23,2164.37
MRAM_DQL7: U1.A2 U5.16 | length 1486
  Top Layer w7: v2(2758.86,2164.37) v2@2759.03,2164.37 ; v1(3936.84,2671.84) U5.16@3936.84,2718.87
  Top Layer w10: v2@2759.03,2164.37 U1.A2@2778.48,2183.82
  L5 Sig w7: v2(2758.86,2164.37) 2758.86,2201.04 2758,2201.9 2874.51,2318.41 ; 2875,2317.91 2969.37,2317.91 2969.63,2318.17 3001.52,2318.17 3001.78,2317.91 3470.47,2317.91 3792.84,2640.28 3905.28,2640.28 v1(3936.84,2671.84)
MRAM_DQU8: U1.B9 U5.29 | length 1270
  Top Layer w7: U5.29@3936.84,2266.12 3933,2269.96 3937.01,2273.97 v1(3937.01,2426.18)
  Top Layer w10: v2@3035.62,2126 U1.B9@3054.07,2144.45
  L3 Sig w7: v2@3035.62,2126 3054,2144.38 3054,2183 3066,2195 3066,2214.62 3100.07,2248.7 3100.07,2284.06 3128.83,2312.82 3469.31,2312.82 3582.68,2426.18 v1(3937.01,2426.18)
  other v2: 3035.43,2125
MRAM_DQU9: U1.C9 U5.30 | length 1415
  Top Layer w7: U5.30@3968.34,2266.12 3963,2271.46 3968.5,2276.96 v1(3968.5,2444.88)
  Top Layer w10: v2@3036,2087.01 U1.C9@3054.07,2105.08
  L3 Sig w7: v2@3036,2087.01 3014,2109.01 3014,2200 3064.96,2250.96 3064.96,2299.02 3089.76,2323.82 3461.61,2323.82 3582.68,2444.88 v1(3968.5,2444.88)
  other v2: 3034.45,2085.63
MRAM_DQU10: U1.B10 U5.31 | length 1285.1
  Top Layer w7: U5.31@3999.83,2266.12 4007,2273.28 4000,2280.28 v1(4000,2408.46)
  Top Layer w10: v2@3075,2126.01 U1.B10@3093.44,2144.45
  L3 Sig w7: v2@3075,2126.01 3094,2145.01 3094,2222.94 3113.19,2242.13 3113.19,2281.62 3132.75,2301.18 3474.41,2301.18 3581.69,2408.46 v1(4000,2408.46)
  other v2: 3073.82,2125
MRAM_DQU11: U1.A11 U5.32 | length 1161.6
  Top Layer w7: v1(4030.51,2390.75) 4030.51,2266.94 U5.32@4031.33,2266.12
  Top Layer w10: v2@3114,2165.01 U1.A11@3132.81,2183.82
  L3 Sig w7: v2@3114,2165.01 3205.59,2256.6 3449.1,2256.6 3583.25,2390.75 v1(4030.51,2390.75)
  other v2: 3113.19,2164.37
MRAM_DQU12: U1.C10 U5.35 | length 1350.3
  Top Layer w7: U5.35@4125.82,2266.12 v1(4125.82,2372.82)
  Top Layer w10: v2(3074,2085.64) U1.C10@3093.44,2105.08
  L5 Sig w7: v2(3074,2085.64) 3093,2104.64
  L3 Sig w7: v2(3074,2085.64) 3094,2105.64 3094,2128.97 3106.53,2141.5 3114.31,2141.5 3134,2161.19 3134,2169.45 3210.15,2245.6 3453.66,2245.6 3580.88,2372.82 v1(4125.82,2372.82)
MRAM_DQU13: U1.A12 U5.36 | length 1196.8
  Top Layer w7: U5.36@4157.31,2266.12 v1(4157.31,2355.31)
  Top Layer w10: v2@3154,2165.64 U1.A12@3172.18,2183.82
  L3 Sig w7: v2@3154,2165.64 3222.96,2234.6 3458.22,2234.6 3578.93,2355.31 v1(4157.31,2355.31)
  other v2: 3152.56,2164.37
MRAM_DQU14: U1.B11 U5.37 | length 1270.2
  Top Layer w7: U5.37@4188.81,2266.12 v1(4188.81,2339.81)
  Top Layer w10: v2(3113.36,2125) U1.B11@3132.81,2144.45
  L3 Sig w7: v2(3113.36,2125) 3130.13,2141.77 3153.46,2141.77 3175.37,2163.67 3175.37,2171.45 3227.52,2223.6 3462.77,2223.6 3577.99,2338.81 4164.15,2338.81 4165.15,2339.81 v1(4188.81,2339.81)
MRAM_DQU15: U1.B12 U5.38 | length 1250.4
  Top Layer w7: U5.38@4220.31,2266.12 v1(4220.31,2323.69)
  Top Layer w10: v2(3153,2125.27) U1.B12@3172.18,2144.45
  L3 Sig w7: v2(3153,2125.27) 3169,2141.26 3192.33,2141.26 3211,2159.93 3211,2191.53 3232.07,2212.6 3467.33,2212.6 ; 3470.28,2212.6 3580.1,2323.69 4181.59,2323.69 4181.98,2323.31 4195.65,2323.31 4196.03,2323.69 v1(4220.31,2323.69)
MRAM_E: U1.G14 U5.6 | length 1494.7
  Top Layer w7: v1(4251.8,2671.8) U5.6@4251.8,2718.87
  Top Layer w10: v2(3231.24,1927.91) U1.G14@3250.92,1947.6
  L5 Sig w7: v2@3233.82,1927.91 v2(3231.24,1927.91) 3251.16,1947.83 3380.91,1947.83 3419.29,1986.22 3419.29,2137.29 3512.26,2230.26 3512.57,2230.26 3833.31,2551 4131,2551 v1(4251.8,2671.8)
MRAM_G: U1.H16 U5.41 | length 1230.1
  Top Layer w7: v2@3310,1883 v2@3310,1888.57 ; U5.41@4314.8,2266.12 4314.8,2211.8 4314.96,2211.96 v1(4314.96,2212.6)
  Top Layer w10: v2@3310,1888.57 U1.H16@3329.66,1908.23
  L3 Sig w7: v2@3310,1883 3375.13,1883 3405.63,1913.5 3456.63,1913.5 3693.9,2150.76 4253.13,2150.76 v1(4314.96,2212.6)
  other v2: 3310.04,1888.78
MRAM_LB: U1.G15 U5.39 | length 1181
  Top Layer w7: v1@4251.8,2209.8 U5.39@4251.8,2266.12
  Top Layer w10: v2(3271,1928.31) U1.G15@3290.29,1947.6
  L3 Sig w7: v2(3271,1928.31) 3290.69,1948 3385.01,1948 3414.37,1977.36 3484.44,1977.36 3681.29,2174.21 4216.21,2174.21 v1@4251.8,2209.8
  other v1: 4251.97,2212.6
MRAM_UB: U1.H12 U5.40 | length 1346.8
  Top Layer w7: U5.40@4283.3,2266.12 4283.46,2265.95 v1(4283.46,2212.6)
  Top Layer w10: v2(3153,1889.05) U1.H12@3172.18,1908.23
  L3 Sig w7: v2@3153,1890 v2(3153,1889.05) 3172.42,1908.46 3378.94,1908.46 3398.62,1928.15 3450.79,1928.15 3685.04,2162.4 4234.4,2162.4 4283.46,2211.46 v1(4283.46,2212.6)
MRAM_W: U1.F16 U5.17 | length 1063.8
  Top Layer w7: v1(3905.35,2672.35) U5.17@3905.35,2718.87
  Top Layer w10: v2@3311,1968.31 U1.F16@3329.66,1986.97
  Bottom Layer w7: v2@3311,1968.31 3380.42,1968.31 3481,2068.89 3481,2248 v1(3905.35,2672.35)
  other v2: 3310.04,1967.52
NetC13_1: C13.1 U3.1 | length 82.6
  Top Layer w7: U3.1@2728.35,2639.76 2809.25,2639.76 C13.1@2810.43,2640.95
NetC14_1: C14.1 U4.1 | length 80.9
  Top Layer w6: C14.1@3137.8,2638.78 C14.1@3140.75,2641.73
  Top Layer w8: U4.1@3060.04,2639.76 C14.1@3136.81,2639.76
NetC15_1: C15.1 U3.2 | length 91.8
  Top Layer w7: U3.2@2728.35,2657.48 2758.86,2657.48 2782.32,2680.95 C15.1@2810.43,2680.95
NetC16_1: C16.1 U4.2 | length 88.9
  Top Layer w8: U4.2@3060.04,2657.48 3096.46,2657.48 3116.14,2677.17 C16.1@3140.75,2677.17
NetC21_2: C21.2 R2.2 R6.1 U6.8 | length 220.9
  Top Layer w10: R2.2@2267.72,2482.28 2267.72,2503.94 2275.59,2511.81 2307.09,2511.81 ; C21.2@2312.99,2482.28 2307.09,2488.19 2307.09,2511.81 ; 2350.39,2511.81 2307.09,2511.81 ; U6.8@2350.39,2562.01 2350.39,2486.22 R6.1@2354.33,2482.28
NetC23_1: C23.1 U2.E3 | length 159.4
  Top Layer w10: C23.1@1750,2803.35 1750,2775 1800,2725 U2.E3@1800,2700
  Top Layer w15: v1(1775,2675) U2.E3@1800,2700
NetC24_1: C24.1 U2.A3 | length 122.4
  Top Layer w10: C24.1@1753.94,2396.65 1753.94,2453.74 1775,2474.8 v1(1775,2475)
  Top Layer w15: v1(1775,2475) U2.A3@1800,2500
NetC25_1: C25.1 U6.6 | length 112.5
  Top Layer w10: C25.1@2234.25,2547.24 2253.94,2527.56 2299.21,2527.56 2311.02,2539.37 U6.6@2311.02,2562.01
NetC35_1: C35.1 R16.1 R18.2 U8.2 | length 221.2
  Top Layer w10: R18.2@1136.65,2420 1248.35,2420 1253.35,2425 1253.35,2385 1253.35,2358.35 1244.84,2349.84 U8.2@1244.84,2326.1
NetC50_1: C50.1 R19.2 R20.1 U8.3 | length 211.7
  Top Layer w10: C50.1@1095,2336.65 R20.1@1135,2336.65 1136.65,2338.31 R19.2@1136.65,2380 1200,2380 1225.16,2354.84 U8.3@1225.16,2326.1
NetC58_1: C58.1 R21.1 R22.2 U8.6 | length 152.9
  Top Layer w10: R22.2@1135,2141.65 1136.65,2140 1205,2140 1205,2170 1225.16,2190.16 U8.6@1225.16,2213.9
NetC65_1: C65.1 R23.2 R24.1 U8.5 | length 178.5
  Top Layer w10: R23.2@1095,2141.65 R24.1@1095,2188.35 C65.1@1135,2188.35 1198.35,2188.35 1205.47,2195.47 U8.5@1205.47,2213.9
NetC70_1: C70.1 R27.1 R31.2 U9.2 | length 219.7
  Top Layer w10: R31.2@1421.65,2415 R27.1@1543.35,2415 C70.1@1543.35,2375 1543.35,2353.35 1534.37,2344.37 U9.2@1534.37,2320.67
NetC71_1: C71.1 L4.2 U1.E4 | length 708.8
  Top Layer w10: v2(2837.54,2006.65) U1.E4@2857.22,2026.34 ; L4.2@3275.59,2312.8 3275.59,2300.2 v1(3297.24,2278.54) 3313.98,2295.28 C71.1@3313.98,2310.04
  Bottom Layer w10: v2(2837.54,2006.65) 2858.44,2027.56 3041.38,2027.56 3055.76,2041.94 3055.76,2053.48 3066.3,2064.02 3077.84,2064.02 3095.73,2081.91 3095.73,2093.46 3106.28,2104 3117.82,2104 3135,2121.18 3135,2132.72 3145.54,2143.27 3156.91,2143.27 3173.87,2160.22 3173.87,2171.59 3184.41,2182.13 3200.83,2182.13 v1(3297.24,2278.54)
NetC73_1: C73.1 R32.2 R34.1 U9.3 | length 216.9
  Top Layer w10: R34.1@1380,2331.65 C73.1@1420,2331.65 1420,2373.35 R32.2@1421.65,2375 1490,2375 1514.68,2350.32 U9.3@1514.68,2320.67
NetC77_1: C77.1 R36.1 R37.2 U9.6 | length 193.4
  Top Layer w10: R37.2@1420,2136.65 1486.69,2136.65 C77.1@1488.35,2135 ; R36.1@1488.35,2095 C77.1@1488.35,2135 ; U9.6@1514.68,2208.46 1514.68,2189.68 1490,2165 1490,2136.65 C77.1@1488.35,2135
NetC79_1: C79.1 R39.2 R40.1 U9.5 | length 182.9
  Top Layer w10: R39.2@1380,2136.65 R40.1@1380,2183.35 C79.1@1420,2183.35 1488.35,2183.35 1495,2190 U9.5@1495,2208.46
NetD3_2: D3.2 R5.2 | length 47.2
  Top Layer w10: D3.2@2192.91,2498.03 R5.2@2192.91,2545.28
NetLED1_4: LED1.4 R10.1 | length 71.8
  Top Layer w10: LED1.4@2549.92,1130.31 2549.92,1146.98 2567.48,1164.54 R10.1@2567.48,1194.88
NetLED1_5: LED1.5 R9.1 | length 64.6
  Top Layer w10: LED1.5@2527.48,1130.31 R9.1@2527.48,1194.88
NetLED1_6: LED1.6 R8.1 | length 71.8
  Top Layer w10: R8.1@2487.48,1194.88 2487.48,1164.54 2505.04,1146.98 LED1.6@2505.04,1130.31
NetLED2_4: LED2.4 R13.1 | length 71.8
  Top Layer w10: LED2.4@2679.92,1130.31 2679.92,1146.98 2697.48,1164.54 R13.1@2697.48,1194.88
NetLED2_5: LED2.5 R12.1 | length 64.6
  Top Layer w10: LED2.5@2657.48,1130.31 R12.1@2657.48,1194.88
NetLED2_6: LED2.6 R11.1 | length 71.8
  Top Layer w10: R11.1@2617.48,1194.88 2617.48,1166.54 2635.04,1148.98 LED2.6@2635.04,1130.31
NetLED3_4: LED3.4 R17.1 | length 71.8
  Top Layer w10: LED3.4@2809.92,1130.31 2809.92,1147.98 2827.48,1165.54 R17.1@2827.48,1194.88
NetLED3_5: LED3.5 R15.1 | length 64.6
  Top Layer w10: LED3.5@2787.48,1130.31 R15.1@2787.48,1194.88
NetLED3_6: LED3.6 R14.1 | length 71.8
  Top Layer w10: R14.1@2747.48,1194.88 2747.48,1164.54 2765.04,1146.98 LED3.6@2765.04,1130.31
NetR1_1: R1.1 U2.C4 | length 250.6
  Top Layer w10: R1.1@1653.94,2396.65 v1(1653.94,2425)
  Top Layer w15: v1(1725,2575) U2.C4@1750,2600
  L5 Sig w10: v1(1653.94,2425) 1653.94,2485.63 1667.32,2499.02 1680.12,2499.02 1700,2518.9 1700,2550 v1(1725,2575)
NetR3_1: R3.1 U2.A4 | length 122.4
  Top Layer w15: R3.1@1703.94,2396.65 1703.94,2453.94 v1(1725,2475) U2.A4@1750,2500